# Altium PCB Copy of MB1363.PcbDoc (part 2 of 6)
Units mm, origin at the board's own origin, x right, y up, seen from the top; angles counter-clockwise.
Board outline 60.78 x 109.88 mm, 4 copper layers (Top Layer, Signal Layer 1, Signal Layer 2, Bottom Layer), stack 0.453 mm thick; 231 components, 215 nets, 716 pads, 2915 vias.
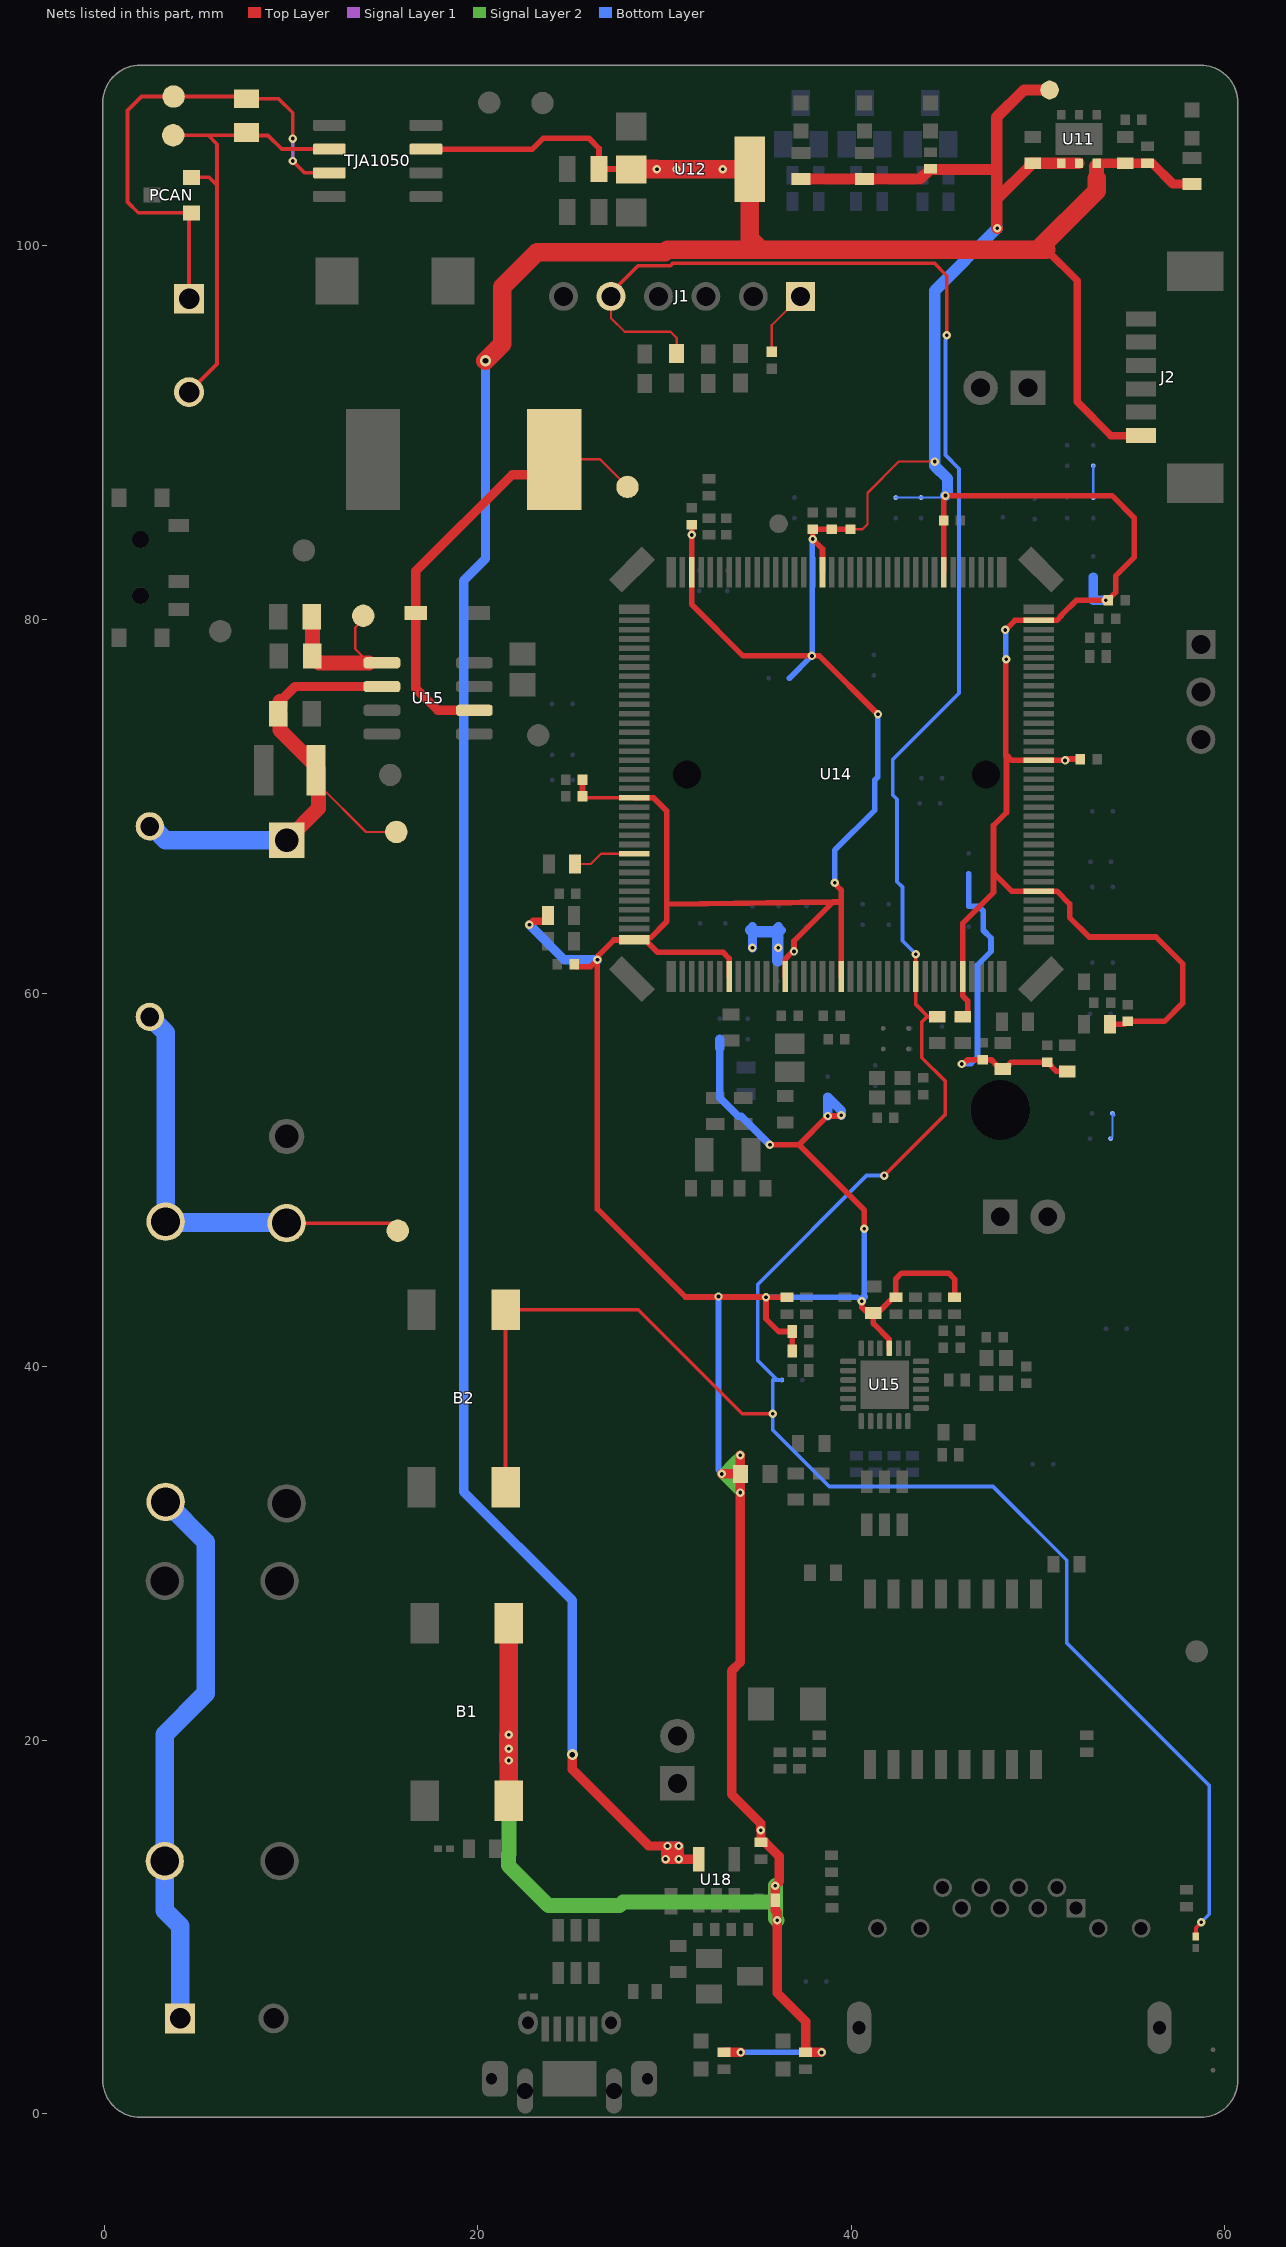
[diagram p4: the nets of this part, all layers, seen from the top]

## Part data
3V3 TP4: library part MCD-00074, "Test Point 1mm", Manufacturer=n/a, ComponentLink1Description=Datasheet, ComponentLink1URL=http://na, ECCN_EU=n/a, ECCN_US=n/a, Internal_Part_Number=MCD-00074, Manufacturer_Part_Number=n/a, Part_Type=Mechanical, Provided_By=n/a, Status=Released
5V 12V 12VBAT CAN_RX CAN_TX GND TP TP2 TP3 TP? TP_CH TP_CL Vin5v: library part TestPoint
B1: library part MCD-00002, "Non-Open Push-Button 0.1A 24V", Manufacturer=WEALTHMETAL, Manufacturer_Part_Number=TD-0341, ComponentLink1Description=Datasheet, ComponentLink1URL=http://tunmcdsvn.tun.st.com/Component_Datasheet_Library/Trunk/Misc/Wealthmetal_Tact-Switch_TD0341, ECCN_EU=n/a, ECCN_US=n/a, Internal_Part_Number=MCD-00002, Part_Type=Misc, Provided_By=SUBCO, Status=Released
B2: library part MCD-00001, "Non-Open Push-Button 0.1A 24V BLACK", Manufacturer=WEALTHMETAL, Manufacturer_Part_Number=TD-0341, ComponentLink1Description=Datasheet, ComponentLink1URL=http://tunmcdsvn.tun.st.com/Component_Datasheet_Library/Trunk/Misc/Wealthmetal_Tact-Switch_TD0341, ECCN_EU=n/a, ECCN_US=n/a, Internal_Part_Number=MCD-00001, Part_Type=Misc, Provided_By=SUBCO, Status=Released
C1: library part Cap_100uF, "100uF +/-20%;  16V; X5R; 1812", Manufacturer_Name="Kyocera AVX", Manufacturer_Part_Number=1210YD107MAT2A, Mouser Part Number=581-1210YD107MAT2A, Datasheet Link=https://datasheet.datasheetarchive.com/originals/distributors/DKDS40/DSANUWW008853.pdf, Geometry.Height=2.79mm, Mouser Price/Stock=https://www.mouser.co.uk/ProductDetail/KYOCERA-AVX/1210YD107MAT2A?qs=dTuOkNN7mNJArH0RUYK6ig%3D%3D
C2: library part Capacitor_0805_Generic, "470pF +/-10%;  200V; X7R; 0805"
C3: library part Capacitor_0805_Generic
C4: library part 04025D104KAT2A, "0402 (1005Metric) CERAMIC CAPACITOR ceramic capacitor 50V 0.1muF ±10% X5R", Case Code (Imperial)=0402, Case Code (Metric)=1005, Manufacturer="Kyocera AVX", Max Operating Temperature=85°C, Min Operating Temperature=-55°C, Tolerance=10%, Voltage Rating=50V, Case/Package=0402, Category="Ceramic Capacitors", ComponentLink1Description=https://datasheet.octopart.com/04025D104KAT2A-KYOCERA-AVX-datasheet-155912759.pdf?src-supplier=Future+Electronics, ComponentLink1URL=https://datasheet.octopart.com/04025D104KAT2A-KYOCERA-AVX-datasheet-155912759.pdf?src-supplier=Future+Electronics, ComponentLink2Description=http://datasheets.avx.com/cx5r.pdf?src-supplier=Digikey, ComponentLink2URL=http://datasheets.avx.com/cx5r.pdf?src-supplier=Digikey, Height=560um, Manufacturer Part Number=04025D104KAT2A, Material=4241ConductorMaterial, Mounting Technology="Surface Mount", Packaging="Cut Tape", Pricing 1="10000=0,008, 20000=0,007, 30000=0,0069, 100000=0,006, 150000=0,0059 (USD)", RoHS=Yes, RoHS Compliant=Yes, Series=-, Stock 1=10000, Supplier 1="Arrow Electronics", Voltage Rating (DC)=50V
C38 C46 C47 C48 C49 C50 C51 C52 C53 C54 C55 C56 C57 C58 C59 C61 C62 C71 C73: library part MCD-00006, "Capacitor, MLCC, 100nF, 16V, X7R, 10%, 0402, T=0.5mm", Alternate_Manufacturer=MURATA, Alternate_Manufacturer_Part_Number=GCM155R71C104KA55D, Manufacturer=YAGEO, Manufacturer_Part_Number=CC0402KRX7R7BB104, Package=C0402, ComponentLink1Description=Datasheet, ComponentLink1URL=http://tunmcdsvn.tun.st.com/Component_Datasheet_Library/Trunk/Capacitors/Yageo_Multilayer_Capacitor_X7R_series_100pF_to_22uF, ECCN_EU=NEC, ECCN_US=EAR99, Internal_Part_Number=MCD-00006, Part_Type=Capacitor, Provided_By=SUBCO, Status=Released
C39 C67: library part MCD-01121, "Capacitor, MLCC, 4.7µF, 10V, X5R, 20%, 0603, T=0,8mm", Manufacturer=MURATA, Manufacturer_Part_Number=GRM188R61A475ME15, Package=C0603, ComponentLink1Description=Datasheet, ComponentLink1URL=http://tunmcdsvn.tun.st.com/Component_Datasheet_Library/Trunk/Capacitors/Murata_Capacitor_GR_series, ECCN_EU=NEC, ECCN_US=EAR99, Internal_Part_Number=MCD-01121, Part_Type=Capacitor, Provided_By=SUBCO, Status=Released
C40: library part MCD-00097, "Capacitor, MLCC, 4.7uF, 16V, X5R, 20%, 0603, T=0,8mm", Alternate_Manufacturer=Murata, Alternate_Manufacturer_Part_Number=GRM188R61C475MAAJ, Manufacturer=MURATA, Manufacturer_Part_Number=GRM188R61C475KE11, Package=C0603, ComponentLink1Description=Datasheet, ComponentLink1URL=http://tunmcdsvn.tun.st.com/Component_Datasheet_Library/Trunk/Capacitors/Murata_Capacitor_GR_series, ECCN_EU=NEC, ECCN_US=EAR99, Internal_Part_Number=MCD-00097, Part_Type=Capacitor, Provided_By=SUBCO, Status=Released
C41 C42: library part MCD-00014, "Capacitor, MLCC, 10uF, 25V, X5R, 10%, 0805, T=0,85mm", Manufacturer=YAGEO, Manufacturer_Part_Number=CC0805KRX5R8BB106, Package=C0805, ComponentLink1Description=Datasheet, ComponentLink1URL=http://tunmcdsvn.tun.st.com/Component_Datasheet_Library/Trunk/Capacitors/Yageo_Multilayer_capacitor_X5R_series_100pF_to_100uF, ECCN_EU=NEC, ECCN_US=EAR99, Internal_Part_Number=MCD-00014, Part_Type=Capacitor, Provided_By=SUBCO, Status=Released
C60 C66 C79 C84 C85 C86 C88 C89: library part MCD-00237, "Capacitor, MLCC, 100nF, 6V3, X5R, 10%, 0603, T=0,8mm", Manufacturer=YAGEO, Manufacturer_Part_Number=CC0603KRX5R5BB104, Package=C0603, ComponentLink1Description=Datasheet, ComponentLink1URL=http://tunmcdsvn.tun.st.com/Component_Datasheet_Library/Trunk/Capacitors/Yageo_Multilayer_capacitor_X5R_series_100pF_to_100uF, ECCN_EU=NEC, ECCN_US=EAR99, Internal_Part_Number=MCD-00237, Part_Type=Capacitor, Provided_By=SUBCO, Status=Released
C63 C69 C72: library part MCD-00238, "Capacitor, MLCC, 1uF, 6V3, X5R, 10%, 0603, T=0,8mm", Manufacturer=YAGEO, Manufacturer_Part_Number=CC0603KRX5R5BB105, Package=C0603, ComponentLink1Description=Datasheet, ComponentLink1URL=http://tunmcdsvn.tun.st.com/Component_Datasheet_Library/Trunk/Capacitors/Yageo_Multilayer_capacitor_X5R_series_100pF_to_100uF, ECCN_EU=NEC, ECCN_US=EAR99, Internal_Part_Number=MCD-00238, Part_Type=Capacitor, Provided_By=SUBCO, Status=Released
C64: library part MCD-01225, "Capacitor, MLCC, 220pF, 50V, NPO, 5%, 0402, T=0,5mm", Manufacturer=YAGEO, Manufacturer_Part_Number=CC0402JRNPO9BN221, Package=C0402, ComponentLink1Description=Datasheet, ComponentLink1URL=http://tunmcdsvn.tun.st.com/Component_Datasheet_Library/Trunk/Capacitors/Yageo_Capacitor_NP0_16V-to-50V, ECCN_EU=N/A, ECCN_US=N/A, Internal_Part_Number=MCD-01225, Part_Type=Capacitor, Provided_By=SUBCO, Status=Released
C65 C68: library part MCD-01716, "Capacitor, MLCC, 10uF, 6V3, X5R, 20%, 0402, T=0.5mm", Manufacturer=YAGEO, Manufacturer_Part_Number=CC0402MRX5R5BB106, Package=C0402, ComponentLink1Description=Datasheet, ComponentLink1URL=http://tunmcdsvn.tun.st.com/Component_Datasheet_Library/Trunk/Capacitors/Yageo_Multilayer_capacitor_X5R_series_100pF_to_100uF/Yageo_Multilayer_capacitor_X5R_100pF_to_100uF.pdf, ECCN_EU=N/A, ECCN_US=N/A, Internal_Part_Number=MCD-01716, Part_Type=Capacitor, Provided_By=SUBCO, Status=Released
C74 C76 C81 C83: library part MCD-01374, "Capacitor, MLCC, 5.6pF, 50V, NPO, 5%, 0402, T=0,5mm", Manufacturer=YAGEO, Manufacturer_Part_Number=CC0402BRNPO9BN5R6, Package=C0402, ComponentLink1Description=Datasheet, ComponentLink1URL=http://tunmcdsvn.tun.st.com/Component_Datasheet_Library/Trunk/Capacitors/Yageo_Capacitor_NP0_16V-to-50V, ECCN_EU=N/A, ECCN_US=N/A, Internal_Part_Number=MCD-01374, Part_Type=Capacitor, Provided_By=SUBCO, Status=Released
C75: library part MCD-01341, "Capacitor, MLCC, 10uF, 6V3, X5R, 20%, 0603, T=0,8mm", Manufacturer=MURATA, Manufacturer_Part_Number=GRM188R60J106ME47D, Package=C0603, ComponentLink1Description=Datasheet, ComponentLink1URL=http://tunmcdsvn.tun.st.com/Component_Datasheet_Library/Trunk/Capacitors/Murata_Capacitor_GR_series, ECCN_EU=NEC, ECCN_US=EAR99, Internal_Part_Number=MCD-01341, Part_Type=Capacitor, Provided_By=SUBCO, Status=Released
C77 C78: library part MCD-01367, "Capacitor,5.1pF,0.25pF,50V,NPO,0603", Manufacturer=YAGEO, Manufacturer_Part_Number=CC0603CRNPO9BN5R1, Package=C0603, ComponentLink1Description=Datasheet, ComponentLink1URL=http://tunmcdsvn.tun.st.com/Component_Datasheet_Library/Trunk/Capacitors/Yageo_Capacitor_NP0_16V-to-50V, ECCN_EU=N/A, ECCN_US=N/A, Internal_Part_Number=MCD-01367, Part_Type=Capacitor, Provided_By=SUBCO, Status=Released
C80: library part MCD-00095, "Capacitor, MLCC, 1uF, 6V3, X5R, 10%, 0402, T=0,5mm", Alternate_Manufacturer=MURATA, Alternate_Manufacturer_Part_Number=GRM155R60J105KE19, Manufacturer_Part_Number=GRM155R61E105KA12, Package=C0402, ComponentLink1Description=Datasheet, ComponentLink1URL=http://tunmcdsvn.tun.st.com/Component_Datasheet_Library/Trunk/Capacitors/Murata_Capacitor_GR_series, ECCN_EU=NEC, ECCN_US=EAR99, Internal_Part_Number=MCD-00095, Manufacturer=MURATA, Part_Type=Capacitor, Provided_By=SUBCO, Status=Released
C82: library part MCD-00724, "Capacitor, MLCC, 470pF, 50V, NPO, 5%, 0402, T=0,5mm", Manufacturer=YAGEO, Manufacturer_Part_Number=CC0402JRNPO9BN471, Package=C0402, ComponentLink1Description=Datasheet, ComponentLink1URL=http://tunmcdsvn.tun.st.com/Component_Datasheet_Library/Trunk/Capacitors/Yageo_Capacitor_NP0_16V-to-50V, ECCN_EU=N/A, ECCN_US=N/A, Internal_Part_Number=MCD-00724, Part_Type=Capacitor, Provided_By=SUBCO, Status=Released
C87: library part MCD-01124, "Capacitor, MLCC, 10µF, 10V, X5R, 10%, 0603, T=0.8mm", Manufacturer=MURATA, Manufacturer_Part_Number=GRM188R61A106KAAL, Package=C0603, ComponentLink1Description=Datasheet, ComponentLink1URL=http://tunmcdsvn.tun.st.com/Component_Datasheet_Library/Trunk/Capacitors/Murata_Capacitor_GR_series, ECCN_EU=NEC, ECCN_US=EAR99, Internal_Part_Number=MCD-01124, Part_Type=Capacitor, Provided_By=SUBCO, Status=Released
C90: library part MCD-00722, "Capacitor, MLCC, 1nF, 2KV, X7R, 10%, 1206, T=1,25mm", Manufacturer=YAGEO, Manufacturer_Part_Number=CC1206KKX7RDBB102, Package=C1206, ComponentLink1Description=Datasheet, ComponentLink1URL=http://tunmcdsvn.tun.st.com/Component_Datasheet_Library/Trunk/Capacitors/Yageo_Multilayer_Capacitor_NPO_X7R_1KV_to_3KV_10pF_to_33nF/, ECCN_EU=N/A, ECCN_US=N/A, Internal_Part_Number=MCD-00722, Part_Type=Capacitor, Provided_By=SUBCO, Status=Released
C91: library part MCD-00009, "Capacitor, MLCC, 4.7uF, 16V, X5R, 10%, 0603, T=0.8mm", Manufacturer=YAGEO, Manufacturer_Part_Number=CC0603KRX5R7BB475, Package=C0603, ComponentLink1Description=Datasheet, ComponentLink1URL=http://tunmcdsvn.tun.st.com/Component_Datasheet_Library/Trunk/Capacitors/Yageo_Multilayer_capacitor_X5R_series_100pF_to_100uF, ECCN_EU=NEC, ECCN_US=EAR99, Internal_Part_Number=MCD-00009, Part_Type=Capacitor, Provided_By=SUBCO, Status=Released
CAN PWR: library part CMP-1684-00017-1, "Female Header, Pitch 5 mm, 1 x 2 Position, Height 10 mm, Tail Length 3.5 mm, Rohs, Bulk", Color=Green, Current=13.5A, Manufacturer="TE Connectivity", Package Description="Female Header, Pitch 5 mm, 1 x 2 Position, Height 10 mm, Tail Length 3.5 mm", Package Reference=THD, Standard Package=300, Voltage=300V, 3D Model=282836-2.pdf, Category=Connectors,Interconnects, Clamp Material - Plating=Brass-NickelPlated, Contact Material - Plating=Brass-TinPlated, Datasheet URL=http://www.te.com.cn/commerce/DocumentDelivery/DDEController?Action=showdoc&DocId=Catalog+Section%7F1308389_EUROSTYLE_TERMINAL_BLOCKS%7F0607%7Fpdf%7FEnglish%7FENG_CS_1308389_EUROSTYLE_TERMINAL_BLOCKS_0607.pdf%7F282836-2, Dynamic Catalog=BuchananSeries, Family=TerminalBlocks-WiretoBoard, Featured Product=EurostyleTerminalBlockConnectors, Features=Interlocking(Side), Housing Material=Polyamide(PA66),Nylon6/6, Manufacturer URL=http://www.te.com, Mating Orientation=HorizontalwithBoard, Mounting Type=ThroughHole, Number of Levels=1, Other Names="5ULV-02B / A98076", Packaging=Bulk, Pitch="0.197\"(5.00mm)", Positions Per Level=2, Product Training Modules=Wire-to-BoardEurostyleTerminalBlocks, RoHS Information=282836-2StatementofCompliance, Screw Material - Plating=Brass-NickelPlated, Screw Thread=M3, Series=Buchanan, Torque - Screw=0.68Nm(6Lb-In), Wire Gauge=16-30AWG, Wire Termination=Screw-RisingCageClamp
CN13: library part MCD-00661, "USB-MICRO-AB Receptacle, RA, SMT + DIP, Standard, Top Mount, USB certified (symbol & footprint compatible with MCD-00022)", Manufacturer=HIROSE, Manufacturer_Part_Number=ZX62RD-AB-5P8(30), ComponentLink1Description=Datasheet, ComponentLink1URL=http://tunmcdsvn.tun.st.com/Component_Datasheet_Library/Trunk/Connectors/Hirose_ZX_catalog-939768, ECCN_EU=n/a, ECCN_US=n/a, Internal_Part_Number=MCD-00661, Part_Type=Connector, Provided_By=SUBCO, Status=Checked
CN14: library part MCD-00717, "RJ45 jack, single port, with LEDS, Metal shielded dip low profile", Manufacturer="DONGGUAN KEYOUDA ELECTRONIC TECHNOLOGY", Manufacturer_Part_Number=KRJ-CB4.2GYZNL, ComponentLink1Description=Datasheet, ComponentLink1URL=http://tunmcdsvn.tun.st.com/Component_Datasheet_Library/Trunk/Connectors/DGKYD_RJ45_KRJ-CB4.2GYZNL, ECCN_EU=n/a, ECCN_US=n/a, Internal_Part_Number=MCD-00717, Part_Type=Connector, Provided_By=SUBCO, Status=Released
D1 D2 D3 D4: "MLC Series Multilayer Varistor 0.5pF; Clamping 25V 0603 Case", Capacitance=0.5pF, Case Code (Imperial)=0603, Case Code (Metric)=1608, Clamping Voltage=25V, Current Rating=5nA, Manufacturer=Bourns, Max Operating Temperature=85°C, Max Voltage Rating (DC)=3.3V, Min Operating Temperature=-40°C, Package Quantity=5000, Supplier Part Number 1=CG0603MLC-3.3LECT-ND, Case/Package=0603, Category=Varistors, ComponentLink1Description=https://datasheet.ciiva.com/366/mlc-366192.pdf?src-supplier=Digi-Key, ComponentLink1URL=https://datasheet.ciiva.com/366/mlc-366192.pdf?src-supplier=Digi-Key, ComponentLink2Description=https://datasheet.ciiva.com/11834/0900766b80dbb952-11834610.pdf?src-supplier=RSComponents, ComponentLink2URL=https://datasheet.ciiva.com/11834/0900766b80dbb952-11834610.pdf?src-supplier=RSComponents, ComponentLink3Description=https://datasheet.ciiva.com/366/mlc-366190.pdf?src-supplier=Digi-Key, ComponentLink3URL=https://datasheet.ciiva.com/366/mlc-366190.pdf?src-supplier=Digi-Key, ComponentLink4Description=https://datasheet.ciiva.com/366/mlc-366191.pdf?src-supplier=Digi-Key, ComponentLink4URL=https://datasheet.ciiva.com/366/mlc-366191.pdf?src-supplier=Digi-Key, ComponentLink5Description=https://datasheet.ciiva.com/10437/mlc-10437033.pdf?src-supplier=Avnet, ComponentLink5URL=https://datasheet.ciiva.com/10437/mlc-10437033.pdf?src-supplier=Avnet, ComponentLink6Description=https://datasheet.ciiva.com/46435/1785244-46435096.pdf?src-supplier=Element14, ComponentLink6URL=https://datasheet.ciiva.com/46435/1785244-46435096.pdf?src-supplier=Element14, Contact Plating=Tin, Depth=0.8mm, Element Configuration=Single, Leakage Current=5nA, Length=1.6mm, Manufacturer Part Number 1=CG0603MLC-3.3LE, Mount="Surface Mount", Number of Channels=1, Number of Circuits=1, Number of Pins=2, Operating Supply Voltage=3.3V, Packaging="Tape and Reel", Pricing 1="1=0,37000, 10=0,29900, 25=0,27360, 100=0,20360, 250=0,18452, 500=0,15272, 1000=0,11453, 2500=0,10499 (USD)", Radiation Hardening=No, Reach SVHC Compliant=Yes, RoHS 1=Yes, RoHS Compliant=Yes, Series=MLC, Stock 1=105939, Supplier 1=Digi-Key, Termination=SMD/SMT, Voltage=3.3V, Voltage Rating (DC)=3.3V, Width=0.8mm, Working Voltage=3.3V
D6: "Diode Schottky 40 V 1A Surface Mount SOD-123", Package="SOD-123 Fairchild Semiconductor", Availability="In Stock", Check_prices=https://www.snapeda.com/parts/1N5819HW-7-F/Diodes+Inc./view-part/?ref=eda, MF="Diodes Inc.", MP=1N5819HW-7-F, Price=None, Purchase-URL=https://pricing.snapeda.com/search/part/1N5819HW-7-F/?ref=eda, SnapEDA_Link=https://www.snapeda.com/parts/1N5819HW-7-F/Diodes+Inc./view-part/?ref=snap
DP1 DP2 DP3 DP4: library part CMP-0902-00067-1, "MUR460 Power Rectifier, 2-Pin Axial_Lead, Pb-Free, Bulk Bag", Manufacturer="On Semiconductor", ComponentLink1Description="Manufacturer URL", ComponentLink1URL=http://www.onsemi.com/, ComponentLink2Description=Datasheet, ComponentLink2URL=http://www.onsemi.cn/pub_link/Collateral/MUR420-D.PDF, ComponentLink3Description="Package Specification", ComponentLink3URL=http://www.onsemi.com/pub_link/Collateral/267-05.PDF, DatasheetVersion="Rev. 15", IFSM Max (A)=110, Mounting Technology="Through Hole", PackageDescription="2-Pin, Axial Lead, Diameter 5.05 mm", PackageReference=AXIAL_LEAD-2-267-05, PackageVersion="Rev. G, 06/2000", Packing="Bulk Bag", PartNumber=MUR460, RoHS=TRUE, Type=Ultrafast, VRRM Max (V)=600
DP5: "ESD Protection Diodes/TVS Diodes 1500W 13.6V Uni-Directional", Package=None, Availability=Unavailable, MP=1.5KE16A, Price=None
F1: library part MF-RX375_72-0_1, "Bourns 3.75A Radial Leaded PCB Mount Resettable Fuse, 72 V", Arrow Part Number=MF-RX375/72-0, Manufacturer_Name=Bourns, Mouser Part Number=652-MF-RX375/72-0, Arrow Price/Stock=https://www.arrow.com/en/products/mf-rx37572-0/bourns?utm_currency=USD&region=europe, Datasheet Link=https://componentsearchengine.com/Datasheets/2/MF-RX375_72-0.pdf, Geometry.Height=29.51mm, Manufacturer_Part_Number=MF-RX375/72-0, Mouser Price/Stock=https://www.mouser.co.uk/ProductDetail/Bourns/MF-RX375-72-0?qs=9FzDyaD7ZFD00YfbCcBudg%3D%3D
J1: library part CMP-1024-00383-1, "0.025\" SQ Post Header, Through-hole, Vertical, -55 to 125 degC, 2.54 mm Pitch, 6-Pin, Male, RoHS", Manufacturer=Samtec, Temperature Range="-55 to 125 degC", ComponentLink1Description="Manufacturer URL", ComponentLink1URL=http://www.samtec.com, ComponentLink2Description=Datasheet, ComponentLink2URL=http://www.samtec.com/documents/webfiles/pdf/TSW_TH.PDF, ComponentLink3Description="Package Specification", ComponentLink3URL=http://www.samtec.com/documents/webfiles/cpdf/TSW-XXX-XX-XXX-X-XX-XXX-MKT.pdf, DatasheetVersion=F-214, Mounting Technology=Through-hole, Orientation=Vertical, PackageDescription=".025[0.64] SQ. Post Terminal Strip Assembly", PackageReference=TSW-106-07-X-S, PackageVersion="DM, 8/1988", PartNumber=TSW-106-07-G-S, Pitch="2.54 mm", RoHS=True
J2: library part CMP-002-00079-1, "1.25mm (.049\") Pitch PicoBlade Header, Surface Mount, Right Angle, Lead-free, 6 Circuits", Color=Beige, Current Rating=1A, Flammability Rating="UL94 V-0", Insulation Resistance=100MR, Manufacturer=Molex, Manufacturer Series=53261, Max Operating Temperature=85°C, Min Operating Temperature=-40°C, Package Quantity=1000, Voltage Rating=125V, Body Plating=Tin, Category="Headers and Wire Housings", ComponentLink1Description=https://datasheet.ciiva.com/5153/0532610671-pcb-headers-170915-5153227.pdf?src-supplier=Mouser, ComponentLink1URL=https://datasheet.ciiva.com/5153/0532610671-pcb-headers-170915-5153227.pdf?src-supplier=Mouser, ComponentLink2Description=https://datasheet.ciiva.com/30206/347800532610671-pcb-headers-30206472.pdf?src-supplier=Onlinecomponents.com, ComponentLink2URL=https://datasheet.ciiva.com/30206/347800532610671-pcb-headers-30206472.pdf?src-supplier=Onlinecomponents.com, ComponentLink3Description=https://datasheet.ciiva.com/11746/0900766b8078fc7f-11746609.pdf?src-supplier=Rs, ComponentLink3URL=https://datasheet.ciiva.com/11746/0900766b8078fc7f-11746609.pdf?src-supplier=Rs, ComponentLink4Description=https://datasheet.ciiva.com/22703/1839670-22703170.pdf?src-supplier=Element14, ComponentLink4URL=https://datasheet.ciiva.com/22703/1839670-22703170.pdf?src-supplier=Element14, ComponentLink5Description=https://datasheet.ciiva.com/34302/1302107-34302178.pdf?src-supplier=Jameco, ComponentLink5URL=https://datasheet.ciiva.com/34302/1302107-34302178.pdf?src-supplier=Jameco, ComponentLink6Description=https://datasheet.ciiva.com/9468/0532610671-pcb-headers-9468508.pdf?src-supplier=Avnet, ComponentLink6URL=https://datasheet.ciiva.com/9468/0532610671-pcb-headers-9468508.pdf?src-supplier=Avnet, ComponentLink7Description=https://datasheet.ciiva.com/14156/gh116861-116874-e-14156230.pdf?src-supplier=Distrelec, ComponentLink7URL=https://datasheet.ciiva.com/14156/gh116861-116874-e-14156230.pdf?src-supplier=Distrelec, Contact Gender=Male, Contact Material=Bronze,Brass,Tin, Contact Plating=Tin, Design Item ID=53261-0671, DIN Conformance=No, Filter Feature=No, Gender=Male, Glow Wire Compliant=Non-compliant, Housing Material=Thermoplastic, IEC Conformance=No, Lead Free="Lead Free", Lead Pitch=1.25mm, Manufacturer Part Number=53261-0671, MIL Conformance=No, Mixed Contacts=No, Mounting Style=STRAIGHT, Mounting Technology=Board, Number of Circuits=6, Number of Contacts=6, Number of Positions=6, Number of Rows=1, Number of Rows Loaded=1, Option="General Purpose", Orientation="Right Angle", Packaging="Tape and Reel", Pitch=1.25mm, Plating=Tin, Pricing 1="1=0,58, 10=0,502, 50=0,502, 100=0,467, 1000=0,437, 10000=0,375 (USD)", Radiation Hardening=No, Reach SVHC Compliant=Unknown, RoHS=Yes, RoHS Compliant=Yes, Series=PicoBlade, Source=Board.SCHLIB, Stock 1=44828, Termination=SMD/SMT, Voltage Rating (AC)=125V, Voltage Rating (DC)=125V, Working Voltage=125V
JP6 JP7 JP8: library part MCD-00683, "Header, 2x1, 2,54mm, VR, TH, Height 5.84mm/2.54mm - Shunt Fitted by default", Alternate_Manufacturer=LIANYI, Alternate_Manufacturer_Part_Number=313102S111116, Manufacturer=SAMTEC, Manufacturer_Part_Number=TSW-102-07-x-S, ComponentLink1Description=Datasheet, ComponentLink1URL=http://tunmcdsvn.tun.st.com/Component_Datasheet_Library/Trunk/Connectors/Samtec_TSW-HTSW-series, ECCN_EU=n/a, ECCN_US=n/a, Internal_Part_Number=MCD-00683, Part_Type=Connector, Provided_By=SUBCO, Status=Released
L1: library part MCD-01340, "Inductor, 2.2uH, 20%, Isat 1.2A, DCR 0.228Ohm, 0805", Manufacturer=MURATA, Manufacturer_Part_Number=DFE201210U-2R2M=P2, Package=L0805, ComponentLink1Description=Datasheet, ComponentLink1URL=http://tunmcdsvn.tun.st.com/Component_Datasheet_Library/Trunk/Inductors/MURATA_Power_Inductor_2u2H_2012_DFE201210U-2R2M=P2, ECCN_EU=n/a, ECCN_US=n/a, Internal_Part_Number=MCD-01340, Part_Type=Inductor, Provided_By=SUBCO, Status=Released
L2: library part MCD-00047, "SMD Chip ferrite bead, 600R@100MHz +/-25%, 350mA, 500mohm DC, 0603, T=0.8mm", Manufacturer=TAI-TECH, Manufacturer_Part_Number=FCM1608KF-601T03, ComponentLink1Description=Datasheet, ComponentLink1URL=http://tunmcdsvn.tun.st.com/Component_Datasheet_Library/Trunk/Inductors/TaiTech_Bead_FCM1608_series, ECCN_EU=n/a, ECCN_US=n/a, Internal_Part_Number=MCD-00047, Part_Type=Inductor, Provided_By=SUBCO, Status=Released
L?: library part SRR1260-680M, "68ÂµH Shielded Wirewound Inductor 2.1A 110mOhm Max Nonstandard", Package="Nonstandard Bourns", Digi-Key_Part_Number=SRR1260-680MCT-ND, Digi-Key_Purchase_URL=https://www.digikey.com/product-detail/en/bourns-inc/SRR1260-680M/SRR1260-680MCT-ND/2127423?utm_source=snapeda&utm_medium=aggregator&utm_campaign=symbol, MF=Bourns, MP=SRR1260-680M, SnapEDA_Link=https://www.snapeda.com/parts/SRR1260-680M/Bourns/view-part/337191/?ref=snap
LD1 LD5 LD8: library part MCD-00588, "LED Green, 0603 SMD, Forward Voltage Typ=2V, Max=2.5V", Alternate_Manufacturer="VISHAY SEMICONDUCTOR OPTO DIVISION", Alternate_Manufacturer_Part_Number=VLMTG1300-GS08, Manufacturer="OSRAM OPTO SEMICONDUCTORS", Manufacturer_Part_Number="LG Q396-PS-35", Package="LED 0603", ComponentLink1Description=Datasheet, ComponentLink1URL="http://tunmcdsvn.tun.st.com/Component_Datasheet_Library/Trunk/Display/OSRAM_LED_GREEN_LG Q396-PS-35", ECCN_EU=n/a, ECCN_US=n/a, Internal_Part_Number=MCD-00588, Order_Code_Digikey="LG Q396-PS-35-ND", Part_Type=Display, Provided_By=SUBCO, Status=Released
LD2: library part MCD-01061, "LED Yellow, 0603 SMD, Forward Voltage min=1.7V, Typ=2V, Max=2.3V", Manufacturer="OSRAM OPTO SEMICONDUCTORS", Manufacturer_Part_Number="LY Q396-P1Q2-36", ComponentLink1Description=Datasheet, ComponentLink1URL="http://tunmcdsvn.tun.st.com/Component_Datasheet_Library/Trunk/Display/OSRAM_LED_0603_YELLOW_LY Q396-P1Q2-36", ECCN_EU=n/a, ECCN_US=n/a, Internal_Part_Number=MCD-01061, Part_Type=Display, Provided_By=SUBCO, Status=Released
LD3: library part MCD-00586, "LED Red, 0603 SMD, Forward Voltage Typ=2V, Max=2.5V", Alternate_Manufacturer="VISHAY SEMICONDUCTOR OPTO DIVISION", Alternate_Manufacturer_Part_Number=VLMS1300-GS08, Manufacturer="OSRAM OPTO SEMICONDUCTORS", Manufacturer_Part_Number="LS Q976-NR-1", Package="LED 0603", ComponentLink1Description=Datasheet, ComponentLink1URL="http://tunmcdsvn.tun.st.com/Component_Datasheet_Library/Trunk/Display/OSRAM_LED_RED_LS Q976-NR-1", ECCN_EU=n/a, ECCN_US=n/a, Internal_Part_Number=MCD-00586, Order_Code_Digikey=475-2512-1-ND, Part_Type=Display, Provided_By=SUBCO, Status=Released
LD7: library part MCD-00587, "LED Red, 0603 SMD, 2V Forward Voltage", Alternate_Manufacturer="OSRAM OPTO SEMICONDUCTORS", Alternate_Manufacturer_Part_Number="LS Q976-NR-1", Manufacturer=VISHAY, Manufacturer_Part_Number=VLMS1300-GS08, Package="LED 0603", ComponentLink1Description=Datasheet, ComponentLink1URL=http://tunmcdsvn.tun.st.com/Component_Datasheet_Library/Trunk/Display/VISHAY_LED_RED_VLMS1300-GS08, ECCN_EU=n/a, ECCN_US=n/a, Internal_Part_Number=MCD-00587, Order_Code_Digikey=VLMS1300-GS08CT-ND, Order_Code_Farnell=2078728, Part_Type=Display, Provided_By=SUBCO, Status=Released
PCAN: library part PESDCAN, "ESD Protection Diodes / TVS Diodes PESD5V2S2UT/SOT23/TO-236AB", Package="SOT-323 Nexperia USA", Availability=Unavailable, MF="Nexperia USA", MP=PESD1CAN, Price=None, SnapEDA_Link=https://www.snapeda.com/parts/PESD1CAN/Nexperia%20USA%20Inc./view-part/2164340/?ref=snap
Q1 Q2 Q3 T1: library part MCD-00073, "NPN Bipolar Transistor", Alternate_Manufacturer="ON SEMICONDUCTOR", Alternate_Manufacturer_Part_Number="MMBT2222LT1G / MMBT2222ALT1G / MMBT2222ALT3G", Manufacturer_Part_Number=BSR14, Package=SOT23, ComponentLink1Description=Datasheet, ComponentLink1URL=http://tunmcdsvn.tun.st.com/Component_Datasheet_Library/Trunk/IC/NXP_Transistor_BSR14, ECCN_EU=NEC, ECCN_US=EAR99, Internal_Part_Number=MCD-00073, Manufacturer="ON SEMICONDUCTOR", Part_Type=IC, Provided_By=SUBCO, Status=Released
R1: library part Resistor_0805, "3.6KΩ +-0.5%; 400V; 0805"
R2: library part Resistor_0805, "1.2KΩ +-1%; 75V; 0805"
R3: library part Resistor_0805, "330mΩ +-1%; 150V; 0805"
R12: library part MCD-00500, "Resistor,620R,0603,1%,1/10W", Manufacturer=YAGEO, Manufacturer_Part_Number=RC0603FR-07620RL, Package=R0603, ComponentLink1Description=Datasheet, ComponentLink1URL=http://tunmcdsvn.tun.st.com/Component_Datasheet_Library/Trunk/Resistors/Yageo_Resistor_RC0603-series, ECCN_EU=NEC, ECCN_US=EAR99, Internal_Part_Number=MCD-00500, Part_Type=Resistor, Provided_By=SUBCO, Status=Released
R25 R43 R45 R46 R49 R51 R60 R63 R66: library part MCD-00053, "Resistor,10K,0402,1%,1/16W", Manufacturer=YAGEO, Manufacturer_Part_Number=RC0402FR-0710KL, Package=R0402, ComponentLink1Description=Datasheet, ComponentLink1URL=http://tunmcdsvn.tun.st.com/Component_Datasheet_Library/Trunk/Resistors/Yageo_Resistor_RC0402-series, ECCN_EU=NEC, ECCN_US=EAR99, Internal_Part_Number=MCD-00053, Part_Type=Resistor, Provided_By=SUBCO, Status=Released
R26: library part MCD-00462, "Resistor,360R,0603,1%,1/10W", Manufacturer=YAGEO, Manufacturer_Part_Number=RC0603FR-07360RL, Package=R0603, BMS_Part_Number=9129744, ComponentLink1Description=Datasheet, ComponentLink1URL=http://tunmcdsvn.tun.st.com/Component_Datasheet_Library/Trunk/Resistors/Yageo_Resistor_RC0603-series, ECCN_EU=NEC, ECCN_US=EAR99, Internal_Part_Number=MCD-00462, Part_Type=Resistor, Provided_By=SUBCO, Status=Released
R27: library part MCD-00354, "Resistor,470R,0603,1%,1/10W", Manufacturer=YAGEO, Manufacturer_Part_Number=RC0603FR-07470RL, Package=R0603, BMS_Part_Number=9129906, ComponentLink1Description=Datasheet, ComponentLink1URL=http://tunmcdsvn.tun.st.com/Component_Datasheet_Library/Trunk/Resistors/Yageo_Resistor_RC0603-series, ECCN_EU=NEC, ECCN_US=EAR99, Internal_Part_Number=MCD-00354, Part_Type=Resistor, Provided_By=SUBCO, Status=Released
R28 R61 R62 R69: library part MCD-00441, "Resistor,270R,0402,1%,1/16W", Manufacturer=YAGEO, Manufacturer_Part_Number=RC0402FR-07270RL, Package=R0402, ComponentLink1Description=Datasheet, ComponentLink1URL=http://tunmcdsvn.tun.st.com/Component_Datasheet_Library/Trunk/Resistors/Yageo_Resistor_RC0402-series, ECCN_EU=NEC, ECCN_US=EAR99, Internal_Part_Number=MCD-00441, Part_Type=Resistor, Provided_By=SUBCO, Status=Released
R33 R34 R35 R53: library part MCD-00052, "Resistor,0R,0402,5%,1/16W", Manufacturer=YAGEO, Manufacturer_Part_Number=RC0402JR-070RL, Package=R0402, ComponentLink1Description=Datasheet, ComponentLink1URL=http://tunmcdsvn.tun.st.com/Component_Datasheet_Library/Trunk/Resistors/Yageo_Resistor_RC0402-series, ECCN_EU=NEC, ECCN_US=EAR99, Internal_Part_Number=MCD-00052, Part_Type=Resistor, Provided_By=SUBCO, Status=Released
R36 R37 R38: library part MCD-00220, "Resistor,10K,0603,1%,1/10W", Manufacturer=YAGEO, Manufacturer_Part_Number=RC0603FR-0710KL, Package=R0603, ComponentLink1Description=Datasheet, ComponentLink1URL=http://tunmcdsvn.tun.st.com/Component_Datasheet_Library/Trunk/Resistors/Yageo_Resistor_RC0603-series, ECCN_EU=NEC, ECCN_US=EAR99, Internal_Part_Number=MCD-00220, Part_Type=Resistor, Provided_By=SUBCO, Status=Released
R39 R40 R41 R42: library part MCD-00056, "Resistor,0R,0603,5%,1/10W", Manufacturer=YAGEO, Manufacturer_Part_Number=RC0603JR-070RL, Package=R0603, ComponentLink1Description=Datasheet, ComponentLink1URL=http://tunmcdsvn.tun.st.com/Component_Datasheet_Library/Trunk/Resistors/Yageo_Resistor_RC0603-series, ECCN_EU=NEC, ECCN_US=EAR99, Internal_Part_Number=MCD-00056, Part_Type=Resistor, Provided_By=SUBCO, Status=Released
R44 R47 R48 R52: library part MCD-00455, "Resistor,33R,0402,1%,1/16W", Manufacturer=YAGEO, Manufacturer_Part_Number=RC0402FR-0733RL, Package=R0402, ComponentLink1Description=Datasheet, ComponentLink1URL=http://tunmcdsvn.tun.st.com/Component_Datasheet_Library/Trunk/Resistors/Yageo_Resistor_RC0402-series, ECCN_EU=NEC, ECCN_US=EAR99, Internal_Part_Number=MCD-00455, Part_Type=Resistor, Provided_By=SUBCO, Status=Released
R50: library part MCD-00068, "Resistor,1K5,0402,1%,1/16W", Manufacturer=YAGEO, Manufacturer_Part_Number=RC0402FR-071K5L, Package=R0402, ComponentLink1Description=Datasheet, ComponentLink1URL=http://tunmcdsvn.tun.st.com/Component_Datasheet_Library/Trunk/Resistors/Yageo_Resistor_RC0402-series, ECCN_EU=NEC, ECCN_US=EAR99, Internal_Part_Number=MCD-00068, Part_Type=Resistor, Provided_By=SUBCO, Status=Released
R54: library part MCD-00723, "Resistor,12K1,0402,1%,1/16W", Manufacturer=YAGEO, Manufacturer_Part_Number=RC0402FR-0712K1L, Package=R0402, ComponentLink1Description=Datasheet, ComponentLink1URL=http://tunmcdsvn.tun.st.com/Component_Datasheet_Library/Trunk/Resistors/Yageo_Resistor_RC0402-series, ECCN_EU=NEC, ECCN_US=EAR99, Internal_Part_Number=MCD-00723, Part_Type=Resistor, Provided_By=SUBCO, Status=Released
R55 R56 R57 R58: library part MCD-00515, "Resistor,75R,0402,1%,1/16W", Manufacturer=YAGEO, Manufacturer_Part_Number=RC0402FR-0775RL, Package=R0402, ComponentLink1Description=Datasheet, ComponentLink1URL=http://tunmcdsvn.tun.st.com/Component_Datasheet_Library/Trunk/Resistors/Yageo_Resistor_RC0402-series, ECCN_EU=NEC, ECCN_US=EAR99, Internal_Part_Number=MCD-00515, Part_Type=Resistor, Provided_By=SUBCO, Status=Released
R59 R64 R65: library part MCD-00063, "Resistor,47K,0402,1%,1/16W", Manufacturer=YAGEO, Manufacturer_Part_Number=RC0402FR-0747KL, Package=R0402, ComponentLink1Description=Datasheet, ComponentLink1URL=http://tunmcdsvn.tun.st.com/Component_Datasheet_Library/Trunk/Resistors/Yageo_Resistor_RC0402-series, ECCN_EU=NEC, ECCN_US=EAR99, Internal_Part_Number=MCD-00063, Part_Type=Resistor, Provided_By=SUBCO, Status=Released
R67 R71 R72 R73: library part MCD-00223, "Resistor,100K,0603,1%,1/10W", Manufacturer=YAGEO, Manufacturer_Part_Number=RC0603FR-07100KL, Package=R0603, ComponentLink1Description=Datasheet, ComponentLink1URL=http://tunmcdsvn.tun.st.com/Component_Datasheet_Library/Trunk/Resistors/Yageo_Resistor_RC0603-series, ECCN_EU=NEC, ECCN_US=EAR99, Internal_Part_Number=MCD-00223, Part_Type=Resistor, Provided_By=SUBCO, Status=Released
R68: library part MCD-00461, "Resistor,360R,0402,1%,1/16W", Manufacturer=YAGEO, Manufacturer_Part_Number=RC0402FR-07360RL, Package=R0402, ComponentLink1Description=Datasheet, ComponentLink1URL=http://tunmcdsvn.tun.st.com/Component_Datasheet_Library/Trunk/Resistors/Yageo_Resistor_RC0402-series, ECCN_EU=NEC, ECCN_US=EAR99, Internal_Part_Number=MCD-00461, Part_Type=Resistor, Provided_By=SUBCO, Status=Released
R74 R75 R76: library part MCD-00222, "Resistor,47K,0603,1%,1/10W", Manufacturer=YAGEO, Manufacturer_Part_Number=RC0603FR-0747KL, Package=R0603, ComponentLink1Description=Datasheet, ComponentLink1URL=http://tunmcdsvn.tun.st.com/Component_Datasheet_Library/Trunk/Resistors/Yageo_Resistor_RC0603-series, ECCN_EU=NEC, ECCN_US=EAR99, Internal_Part_Number=MCD-00222, Part_Type=Resistor, Provided_By=SUBCO, Status=Released
R77: library part MCD-00197, "Resistor,330R,0603,1%,1/10W", Manufacturer=YAGEO, Manufacturer_Part_Number=RC0603FR-07330RL, Package=R0603, BMS_Part_Number=9129729, ComponentLink1Description=Datasheet, ComponentLink1URL=http://tunmcdsvn.tun.st.com/Component_Datasheet_Library/Trunk/Resistors/Yageo_Resistor_RC0603-series, ECCN_EU=NEC, ECCN_US=EAR99, Internal_Part_Number=MCD-00197, Part_Type=Resistor, Provided_By=SUBCO, Status=Released
R78 R79 R80 R81: library part MCD-00565, "Resistor,49R9,0402,1%,1/16W", Manufacturer=YAGEO, Manufacturer_Part_Number=RC0402FR-0749R9L, Package=R0402, ComponentLink1Description=Datasheet, ComponentLink1URL=http://tunmcdsvn.tun.st.com/Component_Datasheet_Library/Trunk/Resistors/Yageo_Resistor_RC0402-series, ECCN_EU=NEC, ECCN_US=EAR99, Internal_Part_Number=MCD-00565, Part_Type=Resistor, Provided_By=SUBCO, Status=Released
Rcan: library part Resistor_0805, "120Ω +-0.5%; 400V; 0805"
SB3 SB4 SB11 SB12 SB15 SB16 SB17 SB18 SB19 SB21 SB25 SB26 SB27 SB29 SB32 SB36 SB46 SB48 SB50 SB52 SB54 SB61 SB63 SB64 SB65 SB66 SB67 SB68 SB71 SB72 SB74 SB75 SB76 SB79 SB80 SB81 SB82 SB83 SB84 SB90 SB91 SB92 SB94 SB96 SB98 SB100 SB101 SB102 SB103 SB104: library part MCD-00071, "Solder Bridge ON", Manufacturer=YAGEO, Manufacturer_Part_Number=RC0603JR-070RL, Package=SB0603, ComponentLink1Description=Datasheet, ComponentLink1URL=http://tunmcdsvn.tun.st.com/Component_Datasheet_Library/Trunk/Resistors/Yageo_Resistor_RC0603-series, ECCN_EU=n/a, ECCN_US=n/a, Internal_Part_Number=MCD-00071, Part_Type=Mechanical, Provided_By=SUBCO, Status=Released
SERIAL: library part CMP-1024-00331-1, "0.025\" SQ Post Header, Through-hole, Vertical, -55 to 125 degC, 2.54 mm Pitch, 3-Pin, Male, RoHS", Manufacturer=Samtec, Temperature Range="-55 to 125 degC", ComponentLink1Description="Manufacturer URL", ComponentLink1URL=http://www.samtec.com, ComponentLink2Description=Datasheet, ComponentLink2URL=http://www.samtec.com/documents/webfiles/pdf/TSW_TH.PDF, ComponentLink3Description="Package Specification", ComponentLink3URL=http://www.samtec.com/documents/webfiles/cpdf/TSW-XXX-XX-XXX-X-XX-XXX-MKT.pdf, DatasheetVersion=F-214, Mounting Technology=Through-hole, Orientation=Vertical, PackageDescription=".025[0.64] SQ. Post Terminal Strip Assembly", PackageReference=TSW-103-07-X-S, PackageVersion="DM, 8/1988", PartNumber=TSW-103-07-F-S, Pitch="2.54 mm", RoHS=True
SW: "Switch Slide SPDT Side Slide 0.3A 4VDC Gull Wing SMD Box", Package=None, Availability=Unavailable, MP=MLL1200S, Price=None
TJA1050: "1/1 Transceiver Half CANbus 8-SO", Package="SO-8 NXP Semiconductors", Availability="In Stock", Check_prices=https://www.snapeda.com/parts/TJA1050T/CM,118/NXP%20USA%20Inc./view-part/304529/?ref=eda, MF="NXP USA", MP=TJA1050T/CM,118, Price=None, Purchase-URL=https://pricing.snapeda.com/search/part/TJA1050T/CM,118/?ref=eda, SnapEDA_Link=https://www.snapeda.com/parts/TJA1050T/CM,118/NXP%20USA%20Inc./view-part/304529/?ref=snap
U11: library part MCD-01025, "LDO, 3.3V, 1.3A, Very low quiescent current BiCMOS voltage regulator", Manufacturer=STMICROELECTRONICS, Package=DFN6-3x3, BMS_Part_Number=9176246, ComponentLink1Description=Datasheet, ComponentLink1URL=http://tunmcdsvn.tun.st.com/Component_Datasheet_Library/Trunk/IC/STM_LDO_ST1L05CPU33R, ECCN_EU=NEC, ECCN_US=EAR99, Internal_Part_Number=MCD-01025, Manufacturer_Part_Number=ST1L05CPU33R, Part_Type=IC, Provided_By="SUBCO with ST control", Status=Released
U12: library part MCD-00088, "IC REG LDO 5V 0.8A SOT223", Manufacturer=STMICROELECTRONICS, Package=SOT-223, BMS_Part_Number=9176133, ComponentLink1Description=Datasheet, ComponentLink1URL=http://tunmcdsvn.tun.st.com/Component_Datasheet_Library/Trunk/IC/STM_LDO_LD1117, ECCN_EU=NEC, ECCN_US=EAR99, Internal_Part_Number=MCD-00088, Manufacturer_Part_Number=LD1117S50TR, Part_Type=IC, Provided_By="SUBCO with ST control", Status=Released
U14: library part MCD-01401, "STM32H745ZIT6U, LQFP144 package, 20x20, with socket footprint", Manufacturer=STMICROELECTRONICS, Manufacturer_Part_Number=STM32H745ZIT6U, Package="LQFP144 20x20", BMS_Part_Number="9175297 (cut 2.0)", ComponentLink1Description=Datasheet, ComponentLink1URL=http://tunmcdsvn.tun.st.com/Component_Datasheet_Library/Trunk/IC/STM_STM32L552ZET6QU, ECCN_EU=NEC, ECCN_US=3A991A2, Internal_Part_Number=MCD-01401, Part_Type=IC, Provided_By="SUBCO with ST control", Status=Released
U15: "Switching Voltage Regulators 1.5A Step-Down/Up 3.0V to 36V 180kHz"
U15: library part MCD-00719, "10/100M RMII Ethernet transceiver", Manufacturer=MICROCHIP, ComponentLink1Description=Datasheet, ComponentLink1URL=http://tunmcdsvn.tun.st.com/Component_Datasheet_Library/Trunk/IC/MICROCHIP_LAN8742A_RMII_PHY, ECCN_EU=n/a, ECCN_US=n/a, Internal_Part_Number=MCD-00719, Manufacturer_Part_Number=LAN8742A-CZ-TR, Part_Type=IC, Provided_By=SUBCO, Status=Released
U16: library part MCD-00250, "Very low capacitance ESD protection , 4 lines", Manufacturer=STMICROELECTRONICS, BMS_Part_Number=9151001, ComponentLink1Description=Datasheet, ComponentLink1URL=http://tunmcdsvn.tun.st.com/Component_Datasheet_Library/Trunk/Diodes/STM_ESD_USBLC6-4SC6, ECCN_EU=NEC, ECCN_US=EAR99, Internal_Part_Number=MCD-00250, Manufacturer_Part_Number=USBLC6-4SC6, Part_Type=IC, Provided_By="SUBCO with ST control", Status=Released
U17: library part MCD-00718, "Discrete Magnetic Transformer Module, 16 pins, SMT, 100 Base-TX", Manufacturer="DONGGUAN KEYOUDA ELECTRONIC TECHNOLOGY", ComponentLink1Description=Datasheet, ComponentLink1URL=http://tunmcdsvn.tun.st.com/Component_Datasheet_Library/Trunk/IC/DGKYD_KMS-1102NL, ECCN_EU=n/a, ECCN_US=n/a, Internal_Part_Number=MCD-00718, Manufacturer_Part_Number=KMS-1102NL, Part_Type=IC, Provided_By=SUBCO, Status=Released
U18: library part MCD-00083, "Enhanced single channel power switches with active low enable pin", Alternate_Manufacturer="TEXAS INSTRUMENTS", Alternate_Manufacturer_Part_Number=TPS2041C, Manufacturer=STMICROELECTRONICS, BMS_Part_Number=9159003, ComponentLink1Description=Datasheet, ComponentLink1URL=http://tunmcdsvn.tun.st.com/Component_Datasheet_Library/Trunk/IC/STM_PWR-Switch_STMPS2141STR, ECCN_EU=NEC, ECCN_US=EAR99, Internal_Part_Number=MCD-00083, Manufacturer_Part_Number=STMPS2141STR, Part_Type=IC, Provided_By="SUBCO with ST control", Status=Released
U19: library part MCD-00163, "Very low capacitance ESD protection", Manufacturer=STMICROELECTRONICS, BMS_Part_Number=9151075, ComponentLink1Description=Datasheet, ComponentLink1URL=http://tunmcdsvn.tun.st.com/Component_Datasheet_Library/Trunk/Diodes/STM_ESD_USBLC6-2, ECCN_EU=NEC, ECCN_US=EAR99, Internal_Part_Number=MCD-00163, Manufacturer_Part_Number=USBLC6-2SC6, Part_Type=IC, Provided_By="SUBCO with ST control", Status=Released
U20 U22 U23: library part MCD-00170, "ESD protection 6V1", Manufacturer=STMICROELECTRONICS, Manufacturer_Part_Number=ESDALC6V1-1U2, BMS_Part_Number=9151132, ComponentLink1Description=Datasheet, ComponentLink1URL=http://tunmcdsvn.tun.st.com/Component_Datasheet_Library/Trunk/Diodes/STM_ESD_ESDALC6V1-1U2, ECCN_EU=NEC, ECCN_US=EAR99, Internal_Part_Number=MCD-00170, Part_Type=Diode, Provided_By="SUBCO with ST control", Status=Released
U21: library part MCD-00251, "High power transient voltage suppressor, 7V breakdown", Manufacturer=STMICROELECTRONICS, Manufacturer_Part_Number=ESDA7P60-1U1M, BMS_Part_Number=9179042, ComponentLink1Description=Datasheet, ComponentLink1URL=http://tunmcdsvn.tun.st.com/Component_Datasheet_Library/Trunk/Diodes/STM_ESD_ESDA7P60-1U1M, ECCN_EU=NEC, ECCN_US=EAR99, Internal_Part_Number=MCD-00251, Part_Type=Diode, Provided_By="SUBCO with ST control", Status=Released
X2 X4: library part MCD-01364, "Crystal 25MHz, 6pF, +-20ppm, 80ohms max, SMD", Manufacturer=NDK, Manufacturer_Part_Number="NX2016SA 25MHz EXS00A-CS11321", Package=NX2016SA, BMS_Part_Number=9157044, ComponentLink1Description=Datasheet, ComponentLink1URL="http://tunmcdsvn.tun.st.com/Component_Datasheet_Library/Trunk/Crystal_Osc/NDK_NX2016SA 25MHz EXS00A-CS11321 (EXS10B-28187)", ECCN_EU=NEC, ECCN_US=EAR99, Internal_Part_Number=MCD-01364, Order_Code_Digikey=644-1367, Part_Type=Crystal_Osc, Provided_By=SUBCO, Status=Released
X3: library part MCD-00091, "Crystal 32.768kHz, 6pF, +-20ppm, 50Kohms max, SMD", Manufacturer=NDK, Manufacturer_Part_Number="NX3215SA 32.768KHz EXS00A-MU00525", BMS_Part_Number=9157034, ComponentLink1Description=Datasheet, ComponentLink1URL="http://tunmcdsvn.tun.st.com/Component_Datasheet_Library/Trunk/Crystal_Osc/NDK_Crystal-For-ST_NX3215SA 32.768KHz EXS00A-MU00525 (EXS10B-21238)", ECCN_EU=NEC, ECCN_US=EAR99, Internal_Part_Number=MCD-00091, Order_Code_Digikey=644-1386, Part_Type=Crystal_Osc, Provided_By=SUBCO, Status=Released

## Free pads (board coordinates)
  round 3.2 hole 3.2 unplated: 0(47.986,53.739)

## Via types
v1: diameter 0.45, hole 0.2, Top Layer to Bottom Layer, tented both sides, 2902 vias
v2: diameter 0.6, hole 0.3, Top Layer to Bottom Layer, tented both sides, 13 vias

## Nets (pads, with @x,y where several pads share a name; then routed paths per layer and width w, separated by ;. In a path a pad name is that pad's centre, name@x,y a point inside that pad or via, vN(x,y) a via of type N, cw(c..) or ccw(c..) an arc to the next point about the centre after c; other vN are vias at no path point)
1V2_MCU: SB75.2 SB76.2 SB79.1 | length 5.7
  Bottom Layer w0.4: v1(36.091,62.429) 36.091,63.129 36.315,63.353 SB75.2@36.115,63.553
  Bottom Layer w0.5: v1(34.716,62.429) 34.716,63.279 ; SB76.2@34.716,63.553 34.716,63.279 ; 34.99,63.279 34.716,63.279 ; 35.841,63.279 SB75.2@36.115,63.553
  Bottom Layer w0.6: 34.616,63.379 34.716,63.279 ; 34.99,63.279 35.841,63.279 ; SB79.1@36.066,61.729 36.066,63.353
3V3: 3V3.1 B1.1 B1.2 C39.2 C46.2 C47.2 C48.2 C49.2 C50.2 C52.2 C55.2 C56.2 C57.2 C59.2 C62.1 C67.2 C79.2 L2.2 R26.2 R27.2 R28.2 R37.2 R40.1 R43.2 R46.2 R49.2 R50.2 R51.2 R59.2 R64.2 R68.2 R69.2 SB18.2 SB19.2 SB25.2 SB32.2 SB83.1 SB92.2 U11.4 U11.5 U14.7 U14.13 U14.19 U14.32 U14.42 U14.56 U14.71 U14.79 U14.92 U14.106 U14.129 U14.144 U15.9 | length 380.5
  Top Layer w0.12: C57.2@25.616,70.529 C57.2@25.691,70.454 ; C49.2@39.966,84.829 40.604,84.829 40.875,85.1 40.875,86.775 42.555,88.455 v1(44.475,88.455)
  Top Layer w0.2: C57.2@25.691,70.454 U14.129@28.391,70.454
  Top Layer w0.3: C59.2@25.166,61.529 25.166,61.518 25.271,61.413 26.05,61.413 v1(26.416,61.779) ; C57.2@25.616,70.454 C57.2@25.616,70.529 C56.2@25.616,71.429 ; U14.129@28.391,70.454 29.421,70.454 30.125,69.75 30.125,64.75 ; C46.2@31.466,85.079 v1(31.466,84.529) U14.106@31.466,82.529 31.466,80.802 34.218,78.05 v1(37.9,78.05) 38.3,78.05 v1@41.425,74.925 ; U14.7@33.466,60.879 33.466,61.859 33.151,62.174 29.646,62.174 U14.144@28.966,62.854 ; v1(35.65,51.875) 37.2,51.875 ; U14.13@36.466,60.879 36.466,61.811 v1@36.843,62.188 ; R43.2@36.555,43.714 v1(35.439,43.714) ; R51.2@36.841,40.829 R50.2@36.841,41.879 36.116,41.879 35.439,42.555 v1(35.439,43.714) ; v1(36.941,62.229) 36.941,62.785 39.028,64.872 ; U14.92@38.466,82.529 38.466,83.779 v1(37.939,84.306) C47.2@37.939,84.829 C48.2@38.966,84.829 C49.2@39.966,84.829 ; v1(39.125,65.9) 39.125,65.859 39.466,65.518 39.466,64.875 ; v1(39.466,53.451) 39.432,53.416 v1(38.741,53.416) 37.2,51.875 ; U14.19@39.466,60.879 39.466,64.875 ; v1(40.566,43.504) 40.566,43.184 40.871,42.879 C79.2@41.191,42.879 ; v1(40.7,47.375) 40.7,48.375 37.2,51.875 ; U15.9@42.041,40.979 42.041,41.454 41.191,42.304 C79.2@41.191,42.879 ; v1@44.95,86.538 C50.2@44.95,85.3 44.95,83.866 44.966,83.85 U14.79@44.966,82.529 ; v1(45.047,86.635) 53.965,86.635 55.15,85.45 55.15,83.325 54.175,82.35 54.175,81.463 53.766,81.054 C52.2@53.766,81.029 v1(53.63,81.029) 52.06,81.029 51.239,80.208 51.239,80.177 51.016,79.954 U14.71@50.041,79.954 48.769,79.954 v1(48.257,79.442) ; R49.2@45.541,43.704 45.541,44.684 45.225,45 42.7,45 42.391,44.691 R46.2@42.391,43.704 42.254,43.704 41.429,42.879 C79.2@41.191,42.879 ; C67.2@45.966,58.729 46.241,59.004 46.241,59.579 45.966,59.854 U14.32@45.966,60.879 45.966,63.729 47.625,65.388 47.625,68.973 48.316,69.664 48.316,72.662 ; 47.675,66.375 48.596,65.454 U14.42@50.041,65.454 51.021,65.454 51.7,64.775 51.7,64.049 52.749,63 56.325,63 57.75,61.575 57.75,59.45 56.779,58.479 C62.1@54.816,58.479 54.791,58.479 54.641,58.329 R40.1@53.866,58.329 ; 48.279,72.662 v1@48.279,77.896 ; 48.4,72.662 48.608,72.454 U14.56@50.041,72.454 v1(51.456,72.454) 51.531,72.529 C55.2@52.266,72.529 ; v1(26.416,61.779) 26.416,48.433 31.124,43.725 35.429,43.725 v1(35.439,43.714) ; v1(26.416,61.779) 26.445,61.808 26.445,61.988 27.295,62.838 28.376,62.838 U14.144@28.391,62.854 U14.144@28.966,62.854 ; U14.144@28.966,62.854 29.066,62.954 29.248,62.954 30.125,63.831 30.125,64.75 ; 30.125,64.75 39.028,64.872 ; 39.028,64.872 39.031,64.875 39.249,64.875 ; 39.028,64.872 39.249,64.875 ; 39.249,64.875 39.466,64.875
  Top Layer w0.4: v1(22.775,63.65) 22.789,63.65 22.991,63.853 23.646,63.853 23.766,63.973 R37.2@23.766,64.153
  Top Layer w0.5: v1(33.066,34.254) L2.2@34.066,34.254 ; R68.2@33.191,3.279 v1(34.091,3.279) ; v1(34.066,35.254) L2.2@34.066,34.254 ; R59.2@35.166,14.529 R59.2@35.171,14.524 ; v1(38.416,3.279) R69.2@37.566,3.279 37.566,4.934 36.041,6.459 v1(36.041,10.354) 36.041,10.779 35.941,10.879 R64.2@35.941,11.424 v1(35.941,12.204) 36.15,12.413 36.15,13.773 35.399,14.524 R59.2@35.171,14.524 ; L2.2@34.066,34.254 v1(34.066,33.254) 34.066,24.167 33.6,23.701 33.6,17.102 35.166,15.536 v1(35.166,15.179) 35.171,15.174 R59.2@35.171,14.524
  Top Layer w0.6: R26.2@37.316,103.579 R27.2@40.716,103.579 43.691,103.579 R28.2@44.212,104.1 ; R28.2@44.291,104.1 47.796,104.1 ; v1(47.825,100.95) 47.796,100.979 47.796,102.506 ; C39.2@49.718,104.428 49.593,104.428 49.573,104.408 49.573,104.283 47.796,102.506 ; C39.2@49.721,104.425 U11.4@51.25,104.425 U11.5@52.2,104.425 ; 3V3.1@50.625,108.35 49.251,108.35 47.796,106.895 47.796,104.1 ; 47.796,102.506 47.796,104.1
  Top Layer w1: B1.2@21.673,16.758 v1(21.673,18.909) v1(21.673,19.534) v1(21.673,20.284) B1.1@21.673,26.258
  Signal Layer 2 w0.3: v1(38.741,53.416) 39.432,53.416 v1(39.466,53.451)
  Signal Layer 2 w0.5: v1(33.066,34.254) 33.706,33.614 ; v1(33.066,34.254) 33.706,34.254 ; v1(33.066,34.254) 33.706,34.894 ; 33.706,33.614 v1(34.066,33.254) 34.066,34.3 ; 33.706,33.614 33.706,34.254 ; 33.706,34.254 33.706,34.894 ; 33.706,34.254 34.02,34.254 34.066,34.3 ; 33.706,34.894 v1(34.066,35.254) 34.066,34.3
  Signal Layer 2 w0.8: 21.65,13.902 21.65,13.275 23.791,11.134 27.6,11.134 27.786,11.32 35.941,11.32 ; 21.673,13.902 v1(21.673,18.909) v1(21.673,19.534) v1(21.673,20.284) ; v1(35.941,12.204) 35.941,11.32 ; v1(36.041,10.354) 35.941,10.454 35.941,11.32
  Bottom Layer w0.12: v1(35.439,43.714) v1@35.529,43.714 ; SB19.2@42.391,86.529 SB18.2@43.741,86.529 44.852,86.529 44.958,86.635 v1(45.047,86.635) ; v1(48.257,79.442) v1@48.279,79.42 ; v1@48.279,77.896 v1(48.3,77.875)
  Bottom Layer w0.3: v1(32.9,43.75) 32.9,34.46 33.066,34.294 v1(33.066,34.254) ; v1(34.091,3.279) v1(38.416,3.279) ; v1@35.509,43.714 40.315,43.714 40.526,43.504 v1(40.566,43.504) ; SB32.2@36.691,76.854 37.887,78.05 v1(37.9,78.05) 37.919,78.069 37.919,84.287 v1(37.939,84.306) ; v1(39.125,65.9) 39.125,67.65 41.27,69.795 41.27,71.405 41.425,71.56 v1@41.425,74.925 ; 40.7,43.727 v1(40.7,47.375) ; v1@48.279,77.896 v1@48.279,79.42 ; v1(33.066,34.254) 33.319,34.506 ; v1(33.066,34.254) v1(34.066,33.254) 34.066,33.759 ; 33.319,34.506 33.561,34.264 ; 33.319,34.506 v1(34.066,35.254) 34.066,34.77 ; 33.561,34.264 34.066,33.759 ; 33.561,34.264 34.066,34.77 ; 34.066,33.759 34.066,34.77
  Bottom Layer w0.4: 32.966,57.054 32.966,54.392 33.955,53.403 34.122,53.403 v1(35.65,51.875) ; v1(40.566,43.504) 40.566,43.593 40.7,43.727
  Bottom Layer w0.5: v1(22.775,63.65) 24.646,61.779 v1(26.416,61.779) ; 32.966,57.054 SB83.1@32.966,57.529 ; v1(38.741,53.416) SB92.2@38.741,54.429 39.466,53.704 v1(39.466,53.451) ; SB25.2@52.966,82.279 52.966,81.029 v1(53.63,81.029)
  Bottom Layer w0.6: v1(45.047,86.635) 45.154,86.742 45.154,87.549 44.475,88.227 v1(44.475,88.455) 44.475,97.6 v1(47.825,100.95)
  Bottom Layer w1: v1(21.673,18.909) v1(21.673,19.534) v1(21.673,20.284)
  other v1: 41.438,74.925
5V: C40.2 C41.2 J2.1 R12.2 R25.2 TJA1050.3 U11.6 U12.2 U12.4 U18.5 | length 176.2
  Top Layer w0.12: U11.6@53.15,104.425 U11.6@53.153,104.428
  Top Layer w0.3: TJA1050.3@17.235,105.185 22.935,105.185 23.525,105.775 25.95,105.775 26.5,105.225 C41.2@26.5,104.12 U12.2@28.205,104.12
  Top Layer w0.4: 50.45,99.8 52.1,98.15 52.1,91.65 53.9,89.85 J2.1@55.525,89.85
  Top Layer w0.5: v2(25.075,19.225) 25.075,18.425 29.171,14.329 v1(30.166,14.329) ; U18.5@31.841,13.624 31.836,13.629 v1(30.766,13.629) ; U11.6@53.153,104.428 C40.2@54.668,104.428 R25.2@55.868,104.428 56.122,104.428 57.232,103.318 R12.2@58.248,103.318 ; v1(30.066,13.629) v1@30.166,13.729 ; v1(30.066,13.629) 30.066,14.229 v1(30.166,14.329) ; v1(30.066,13.629) v1@30.266,13.629 ; v1@30.166,13.729 v1(30.766,14.329) ; v1@30.166,13.729 v1(30.166,14.329) ; v1@30.166,13.729 v1@30.266,13.629 ; v1(30.166,14.329) v1(30.766,14.329) ; v1@30.266,13.629 v1(30.766,13.629) ; v1(30.766,13.629) v1(30.766,14.329)
  Top Layer w0.8: 53.142,103.592 U11.6@53.142,104.25